# Altium PCB PCBtest2.PcbDoc
Units mm, origin at the board's own origin, x right, y up, seen from the top; angles counter-clockwise.
Board outline 54.25 x 17.5 mm, 2 copper layers (Top Layer, Bottom Layer); 12 components, 16 nets, 36 pads, 0 vias.
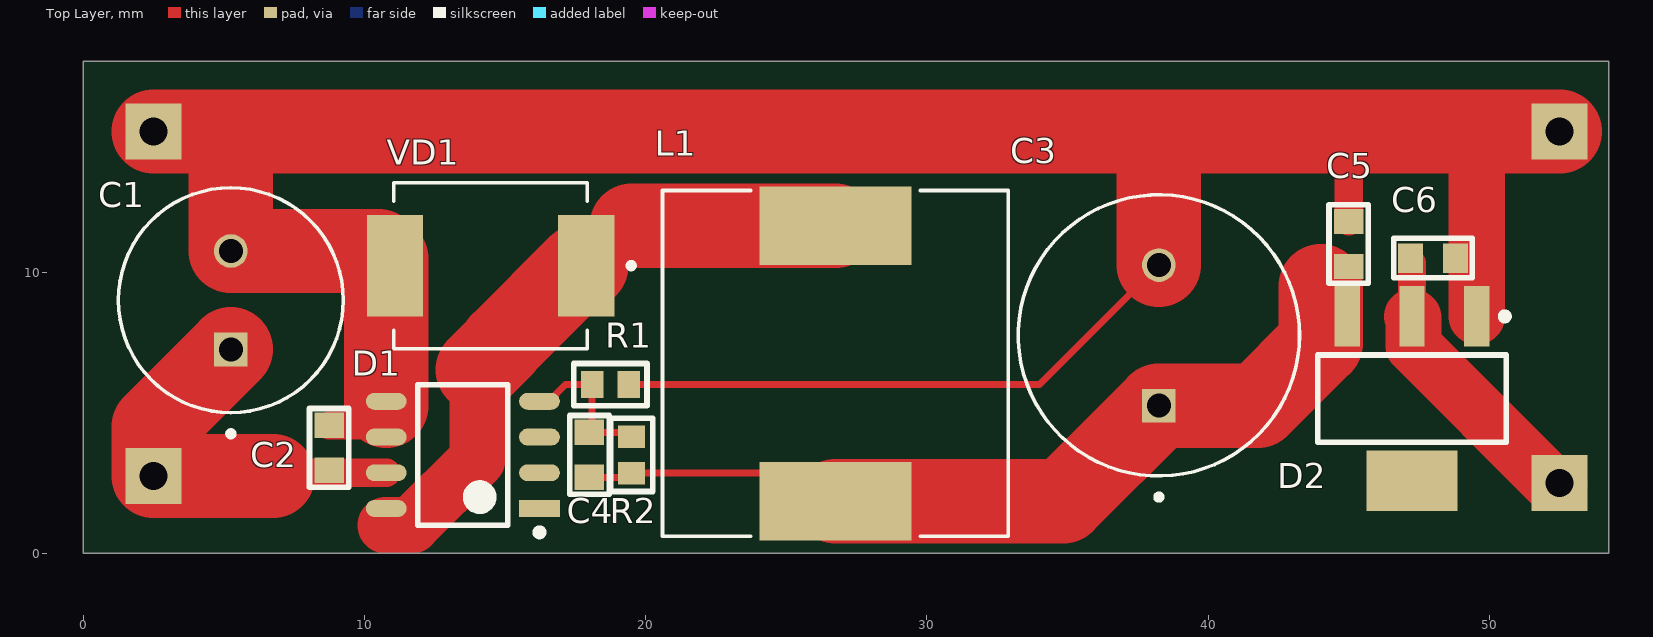
[diagram p0: Top Layer view]
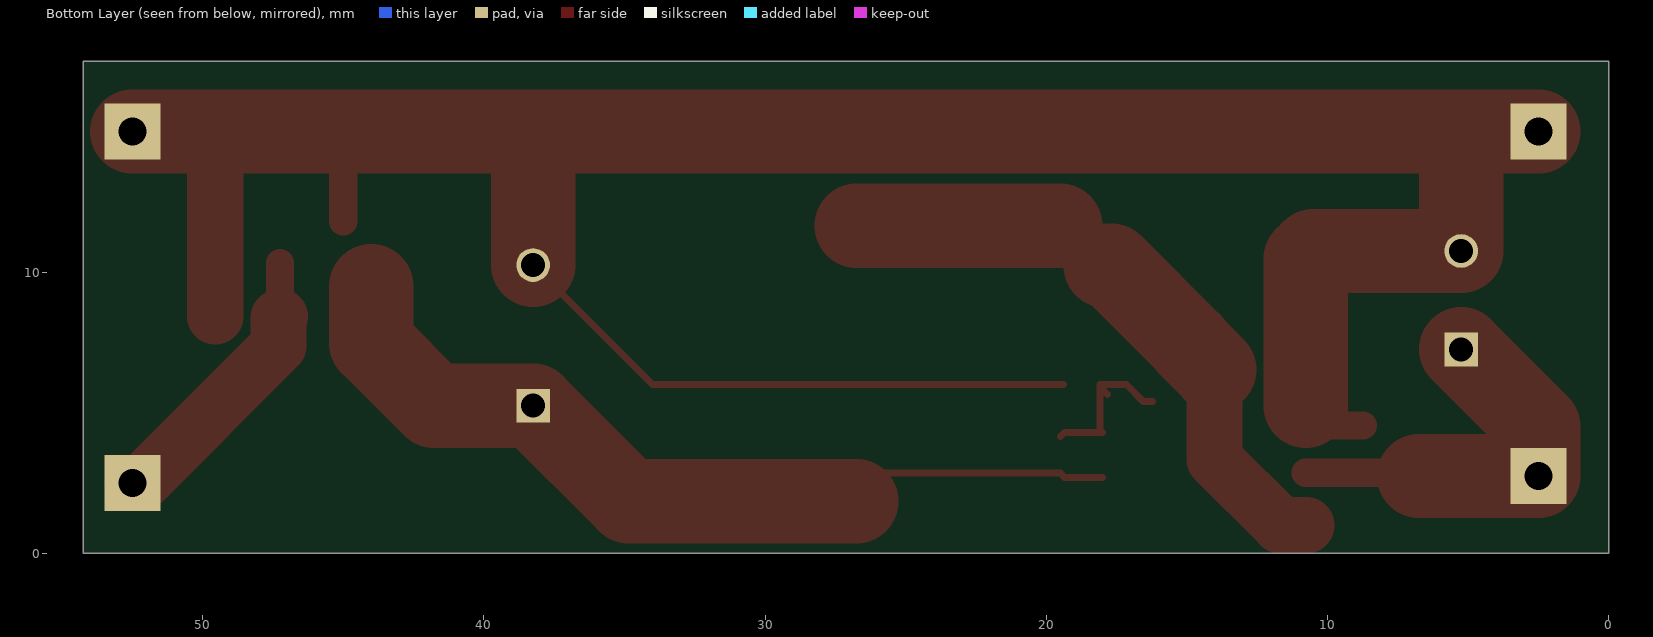
[diagram p1: Bottom Layer view, seen from below]
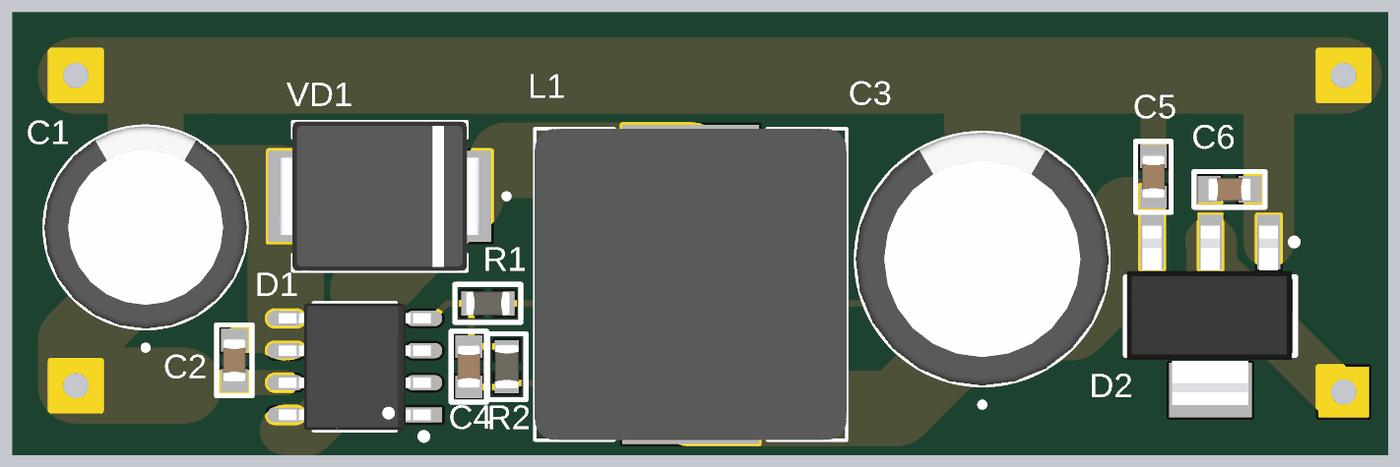
[diagram p2: 3D render of the assembled board from above, using the file's embedded part models]

## Layer stack, top to bottom
Top Solder: solder mask 0.0102, Solder Resist, Dk 3.5
Top Layer: signal copper 0.0356
Dielectric 1: dielectric 0.32, FR-4, Dk 4.8
Bottom Layer: signal copper 0.0356
Bottom Solder: solder mask 0.0102, Solder Resist, Dk 3.5

## Board outline
0,0 54.25,0 54.25,17.5 0,17.5

## Design rules (kind name [scope] priority, off if disabled: settings)
Clearance [All] p1: gap=0.25 ignorepadtopadclearanceinfootprint=FALSE
PolygonConnect [All] p1: connectstyle=Relief reliefconductorwidth=0.254 reliefentries=4 polygonreliefangle="90 Angle" airgapwidth=0.254
RoutingVias [All] p1: holewidth=0.711 width=1.27 viastyle="Through Hole" minholewidth=0.711 minwidth=1.27 maxholewidth=0.711 maxwidth=1.27
SolderMaskExpansion [All] p1: expansion=0.102 istentingtop=FALSE
SupplyNets "Schematic Supply Nets_3" [InNet('+3,3 В')] p1: voltage=0.000
SupplyNets "Schematic Supply Nets_2" [InNet('GND')] p2: voltage=0.000
SupplyNets "Schematic Supply Nets_1" [InNet('+U_bat')] p3: voltage=0.000
SupplyNets "Schematic Supply Nets" [InNet('+12 В')] p4: voltage=0.000
Width Width_1 [InNet('NetC4_1')] p1: maxlimit=0.5 minlimit=0.25 preferedwidth=0.25
Width [All] p2: maxlimit=3 minlimit=0.25 preferedwidth=2
30 further rules are at their usual default settings.

## Components (designator, comment, footprint, x,y, rotation, side; value= is the part's Value field where it differs from the comment)
C1 "Конденсатор полевой" "RADIAL-2 8mm" 5.25,9 r90 top value="470 мк"
C2 "Конденсатор" 0603C 8.75,3.75 r270 top value="1 мк"
C3 "Конденсатор полевой" "RADIAL-2 10MM" 38.25,7.75 r90 top value="470 мк"
C4 "Конденсатор" 0603C 18,3.5 r270 top value="3,3 н"
C5 "Конденсатор" 0603C 45,11 r270 top value="100 н"
C6 "Конденсатор" 0603C 48,10.5 r180 top value="10 мк"
D1 "LM2594HVM-ADJ" SOIC_8N 13.5,3.5 r180 top
D2 "LD1117S33CTR" SOT223 47.25,5.5 r270 top
L1 "Inductance" IND_B82477G 26.75,6.75 r270 top value="47 мк"
R1 "Resistor" 0603R 18.75,6 r0 top value="1 к"
R2 "Resistor" 0603R 19.5,3.5 r270 top value="3 к"
VD1 "Диод Шоттки" SMC 14.5,10.25 r180 top value={Номинал}

## Footprints (in the part's own frame and the unit in brackets; to place one, negate y for a bottom-side part, rotate by r counter-clockwise, add the part's x,y. Pads: shape width x height; smd on the part's side, far side on the other; paste and mask are expansions set on the pad)
0603C [mm] "Chip Resistor, 2-Leads, Body 1,40x0,80mm, IPC Medium Density"
  rect 0.9x1.05 smd: 1(-0.8,0) 2(0.8,0)
  silkscreen extent -1.4,-0.7 1.4,0.7, body extent -0.85,-0.45 0.85,0.45, height 0.9
0603R [mm] "Chip Resistor, 2-Leads, Body 1.60x0.85mm, IPC Medium Density"
  rect 0.8x0.95 smd: 1(-0.65,0) 2(0.65,0)
  silkscreen extent -1.3,-0.75 1.3,0.75, body extent -0.87,-0.47 0.88,0.48, height 0.9
IND_B82477G [mm]
  rect 2.8x5.4 smd: 1(-4.9,0) 2(4.9,0)
  silkscreen extent -6.15,-6.15 6.15,6.15, body extent -6.15,-6.15 6.15,6.15, height 6
"RADIAL-2 8mm" [mm]
  rect 1.2x1.2 hole 0.85: 1(-1.75,0)
  round 1.2 hole 0.85: 2(1.75,0)
  silkscreen extent -4.85,-4 4,4, body extent -4,-4 4,4, height 11.5
"RADIAL-2 10MM" [mm]
  rect 1.2x1.2 hole 0.85: 1(-2.5,0)
  round 1.2 hole 0.85: 2(2.5,0)
  silkscreen extent -5.85,-5 5,5, body extent -5,-5 5,5, height 12.5
SMC [mm]
  rect 2x3.6 smd: 1(3.415,0.021) 2(-3.385,0.021)
  silkscreen extent -5.08,-2.93 3.45,2.97, body extent -3.96,-2.93 3.99,2.97, height 2.65
SOIC_8N [mm] "for operational amplifier"
  rect 1.45x0.6 smd: 1(-2.725,1.905)
  oval 1.45x0.6 smd: 2(-2.725,0.635) 3(-2.725,-0.635) 4(-2.725,-1.905) 5(2.725,-1.905) 6(2.725,-0.635) 7(2.725,0.635) 8(2.725,1.905)
  silkscreen extent -2.85,-2.5 1.6,2.88, body extent -3,-2.5 3,2.5, height 1.75
SOT223 [mm] "SOT223, ld1117"
  rect 2.15x0.9 smd: 1(-2.925,2.3) 2(-2.925,0) 3(-2.925,-2.3)
  rect 2.15x3.25 smd: 4(2.925,0)
  silkscreen extent -3.05,-3.35 1.55,3.43, body extent -3.56,-3.3 3.51,3.2, height 1.6

## Part data
C1: library part Capacitor_pol, "Конденсатор электролит. 470 мкФ, 50 В, 8 мм"
C2: library part Capacitor, "Конденсатор керамический SMD, 0603, 1 мкФ"
C3: library part Capacitor_pol, "Конденсатор электролит. 35В, 470мкФ, 10x16"
C4: library part Capacitor, "Конденсатор керамический SMD, 0603"
C5: library part Capacitor, "Конденсатор керамический SMD, 0603, 0.1 uF"
C6: library part Capacitor, "Конденсатор керамический smd 10 мкФ, 0603,"
D1: "Импульсный DC-DC преобразователь, вход до 60 вольт, регулируемый выход, выходной ток 2 Ампера"
D2: "Линейный стабилизатор напряжения 3,3 вольта. Максимальный ток - 0,8 ампер, гарантированное падение напряжения 1,3 вольта"
L1: "Катушка индуктивности SMD, 47 мкГн, 2.5 А, 12.8х12.8, B82477G4473M,"
R1: "0.1Вт 0603 1 кОм, 1%. Чип резистор (SMD)"
R2: "0.1Вт 0603 1 кОм, 1%, Чип резистор (SMD)"
VD1: library part "Schottky diode", "Диод Шоттки 30 В 3 А, SMD, SMC, SK33"

## Free pads (board coordinates)
  rect 2x2 hole 1: 4(2.5,15) 5(2.5,2.75) 6(52.5,15) 7(52.5,2.5)

## Nets (pads, with @x,y where several pads share a name; then routed paths per layer and width w, separated by ;. In a path a pad name is that pad's centre, name@x,y a point inside that pad or via, vN(x,y) a via of type N, cw(c..) or ccw(c..) an arc to the next point about the centre after c; other vN are vias at no path point)
"+3,3 В": C6.2 D2.2 pad.7 | length 10.2
  Top Layer w1: D2.2 C6.2@47.25,10.325
  Top Layer w2: D2.2 47.3,8.375 47.3,7.382 52.182,2.5 pad.7
"+12 В": 
+U_bat: C1.1 C2.2 D1.7 pad.5 | length 13.3
  Top Layer w1: 7.365,2.865 D1.7
  Top Layer w3: C1.1 2.5,4.5 pad.5 6.75,2.75
GND: C1.2 C2.1 C3.2 C5.1 C6.1 D1.5 D1.6 D2.1 pad.4 pad.6 R1.2 VD1.1 | length 102.9
  Top Layer w0.25: R1.2 34,6 C3.2
  Top Layer w1: C2.1 9.895,4.55 10.595,5.25 D1.5@10.775,5.25 ; C5.1 45,15
  Top Layer w2: 48.75,15 49.55,14.2 D2.1
  Top Layer w3: pad.4 5.25,15 ; D1.5@10.775,5.25 D1.5 10.775,10.475 10.5,10.75 C1.2 5.25,15 ; C3.2 38.25,15 ; pad.6 48.75,15 45,15 38.25,15 ; 5.25,15 38.25,15
NetC3_1: C3.1 C4.2 C5.2 D2.3 L1.2 R2.2 | length 30.8
  Top Layer w0.25: C4.2 19.35,2.7 R2.2 25.75,2.85 L1.2
  Top Layer w3: L1.2 34.85,1.85 C3.1 41.775,5.25 44,7.475 44,9.5
NetC4_1: C4.1 D1.4 R1.1 R2.1 | length 5.8
  Top Layer w0.25: D1.4 16.555,5.405 17.15,6 R1.1 R1.1@18.1,5.925 ; R1.1@17.825,5.65 R1.1@18.1,5.925 ; R2.1 19.35,4.3 C4.1 18.1,4.4 R1.1@18.1,5.925
NetC9_1: 
NetC18_1: 
NetC19_1: 
NetD1_8: D1.8 L1.1 VD1.2 | length 20.1
  Top Layer w2: 10.75,1 11.682,1 14.025,3.343 14.025,6.529
  Top Layer w3: 14.025,6.529 14.885,7.389 14.885,7.429 17.685,10.229 VD1.2 ; 19.506,11.65 L1.1
NetD3_2: 
NetD3_3: 
NetDD1_7: 
NetDD1_34: 
NetDD1_37: 
NetDD1_44: 
pads on no net: D1.1 D1.2 D1.3 D2.4